# EAGLE board audio_jack_passthru_pinguinOut (EAGLE 9.6.2)
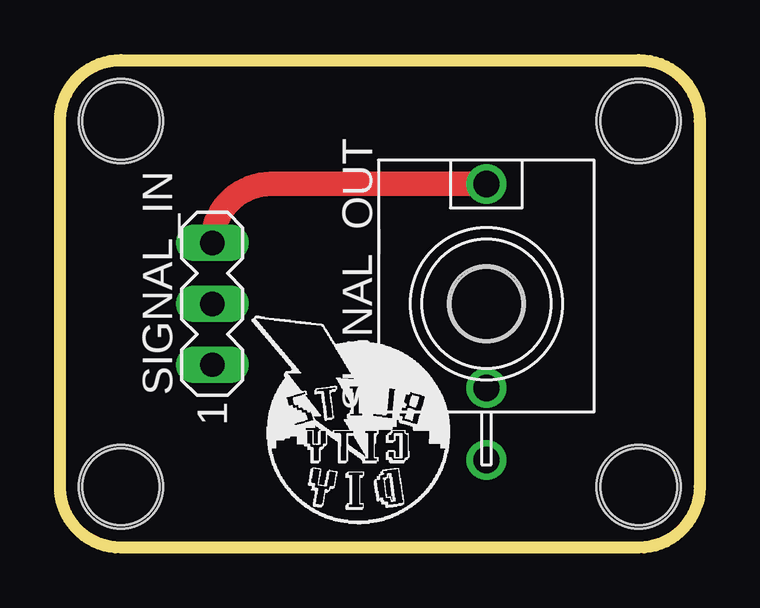
[diagram p0: board, top side]
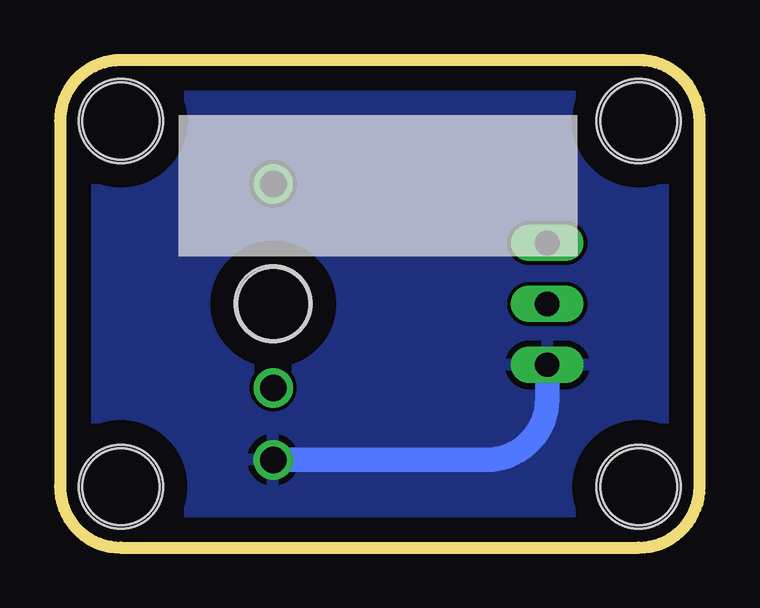
[diagram p1: board, bottom side, seen from below]

Size 26.67 x 20.32 mm. Coordinates in mm from the lower left corner, seen from the top.
Outline: 2.54,20.32 24.13,20.32 arc-90 26.67,17.78 26.67,2.54 arc-90 24.13,0 2.54,0 arc-90 0,2.54 0,17.78 arc-90 2.54,20.32
Copper layers (1*16): Top 0.035mm / dielectric 1.5mm / Bottom 0.035mm
Design rules "default": minimum track width 6mil, minimum drill 0.35mm, track to track 6mil, track to pad 6mil, pad to pad 6mil, via to via 6mil, smd to smd 6mil, copper to edge 40mil, drill to drill 6mil, minimum pad ring 10mil, minimum via ring 8mil, stop-mask expansion 4mil, vias tented up to drill 0mil, thermal gap 10mil
Holes 3 mm at 17.78,10.16
Holes 3.2 mm at 17.78,10.16 17.78,10.16 2.54,17.78 24.13,17.78 24.13,2.54 2.54,2.54
Holes 3.5 mm at 2.54,17.78 24.13,17.78 24.13,2.54 2.54,2.54 2.54,17.78 24.13,17.78 24.13,2.54 2.54,2.54

## Footprints (pad centres in the part's own frame; a part is rotated, then mirrored left to right if it is on the bottom)
MA03-1 = drill 1.016 long: 1 -2.54,0; 2 0,0; 3 2.54,0
WQP-PJ301M-12_JACK = drill 1.1: P$1 0,5; P$2 0,-3.5; P$3 0,-6.5

## Placement (x,y rotation side)
pLabel0  [pLabel0]  4.8,17.27 0 top
pLabel1  [pLabel1]  2.34,9.7 0 top
pLabel2  [pLabel2]  22.99,9.7 0 top
pLabel3  [pLabel3]  16.54,18.36 0 bottom
SIGNAL_IN  [MA03-1]  6.35,10.16 90 top
SIGNAL_OUT  WQP-PJ301M-12_JACK  [WQP-PJ301M-12_JACK]  17.78,10.16 0 top

## Library data of the parts
pLabel0 pLabel1-pLabel3 = pinguin
SIGNAL_IN = con-lstb; OC_FARNELL: unknown; OC_NEWARK: unknown
SIGNAL_OUT = thonkiconn

## Nets
GND: SIGNAL_IN.1 SIGNAL_OUT.P$3
RING: SIGNAL_IN.2
TIP: SIGNAL_IN.3 SIGNAL_OUT.P$1

## Tracks (layer width: path | path; a pad name or v marks a point on that pad's centre or on a via)
GND
  Bottom 1.016: SIGNAL_IN.1 6.35,6.2 arc90 8.89,3.66 SIGNAL_OUT.P$3
  pour Bottom: 11.43,20.32 20.32,20.32 24.13,20.32 arc-90 26.67,17.78 26.67,8.89 26.67,2.54 arc-90 24.13,0 19.05,0 2.54,0 arc-90 0,2.54 0,10.16 0,17.78 arc-90 2.54,20.32 3.81,20.32
TIP
  Top 1.016: SIGNAL_IN.3 arc-90 8.81,15.16 SIGNAL_OUT.P$1

## Text on the board
Pinguin_tBackup: ARTURIA PATCH BAY | ⚡ | ⚡
Pinguin_bBackup: SIGNAL NAME: